# Altium PCB PCB1.PcbDoc
Units mil, origin at the board's own origin, x right, y up, seen from the top; angles counter-clockwise.
Board outline 4291.34 x 2913.39 mil, 2 copper layers (Top Layer, Bottom Layer); 1 components, 2 nets, 7 pads, 0 vias.
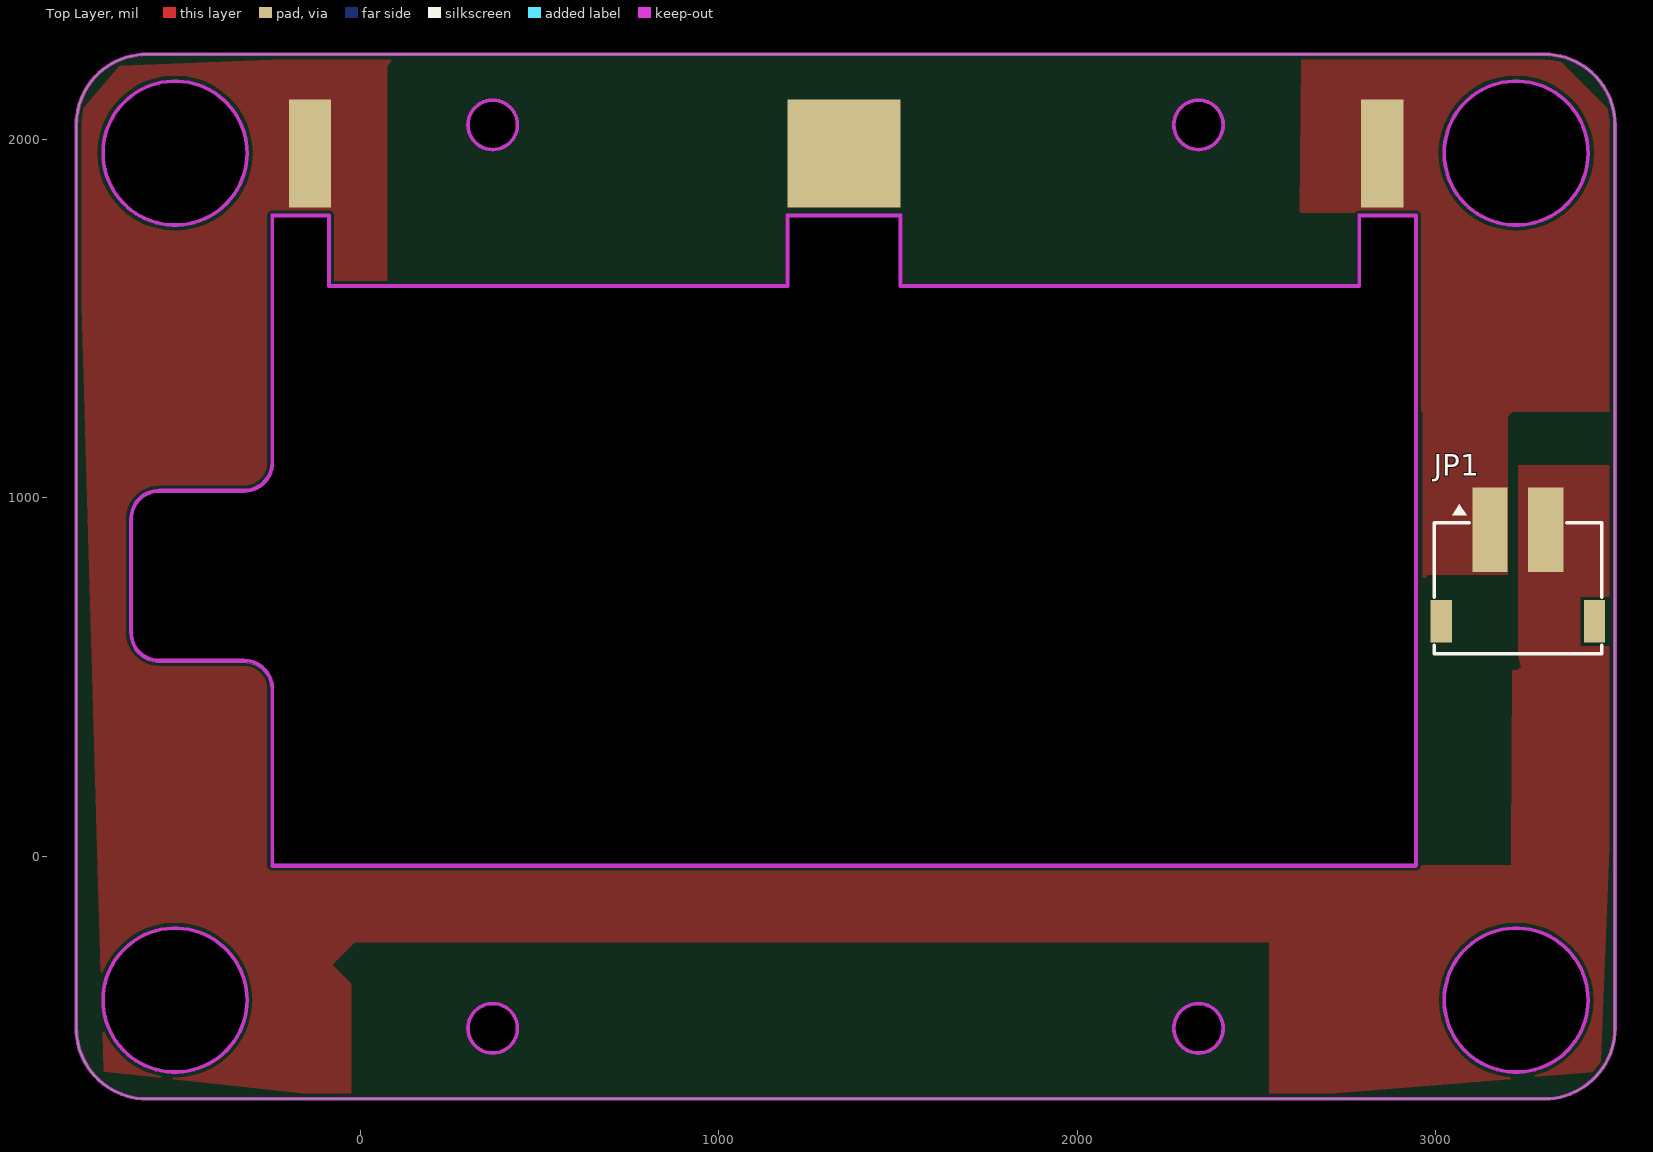
[diagram p0: Top Layer view]
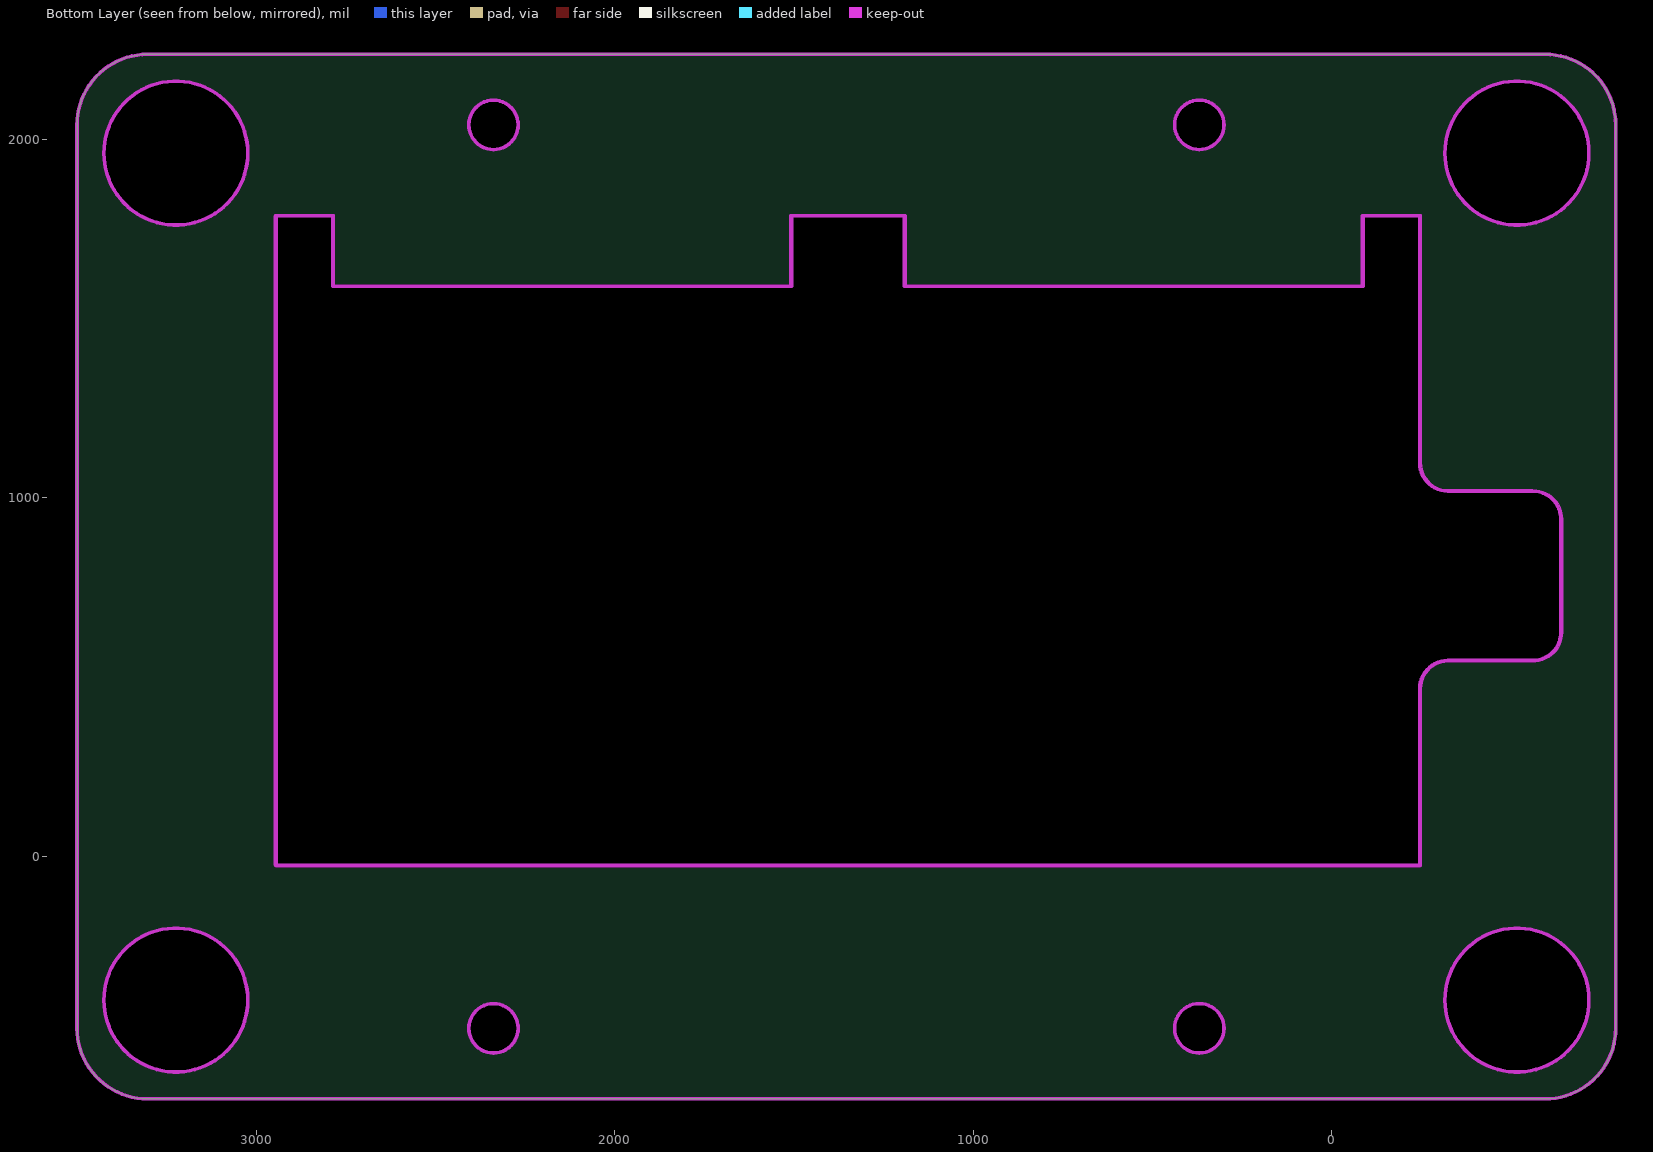
[diagram p1: Bottom Layer view, seen from below]

## Layer stack, top to bottom
Top Solder: solder mask 0.4, Solder Resist, Dk 3.5
Top Layer: signal copper 1.4
Dielectric 1: dielectric 12.6, FR-4, Dk 4.8
Bottom Layer: signal copper 1.4
Bottom Solder: solder mask 0.4, Solder Resist, Dk 3.5

## Board outline
-791.86,-479.85 ccw(c-595.01,-479.85) -595.01,-676.7 3302.63,-676.7 ccw(c3302.63,-479.85) 3499.48,-479.85 3499.48,2039.83 ccw(c3302.63,2039.83) 3302.63,2236.69 -595.01,2236.69 ccw(c-595.01,2039.83) -791.86,2039.83
cut-out: 2269.16,2039.83 ccw(c2338.06,2039.83) 2338.06,1970.94 ccw(c2338.06,2039.83) 2406.96,2039.83 ccw(c2338.06,2039.83) 2338.06,2108.73 ccw(c2338.06,2039.83)
cut-out: 2269.16,-479.85 ccw(c2338.06,-479.85) 2338.06,-548.75 ccw(c2338.06,-479.85) 2406.96,-479.85 ccw(c2338.06,-479.85) 2338.06,-410.95 ccw(c2338.06,-479.85)
cut-out: 300.66,-479.85 ccw(c369.56,-479.85) 369.56,-548.75 ccw(c369.56,-479.85) 438.45,-479.85 ccw(c369.56,-479.85) 369.56,-410.95 ccw(c369.56,-479.85)
cut-out: 369.56,1970.94 cw(c369.56,2039.83) 300.66,2039.83 cw(c369.56,2039.83) 369.56,2108.73 cw(c369.56,2039.83) 438.45,2039.83 cw(c369.56,2039.83)
cut-out: 3023.1,-401.11 ccw(c3223.89,-401.11) 3223.89,-601.9 ccw(c3223.89,-401.11) 3424.67,-401.11 ccw(c3223.89,-401.11) 3223.89,-200.32 ccw(c3223.89,-401.11)
cut-out: 3023.1,1961.09 ccw(c3223.89,1961.09) 3223.89,1760.31 ccw(c3223.89,1961.09) 3424.67,1961.09 ccw(c3223.89,1961.09) 3223.89,2161.88 ccw(c3223.89,1961.09)
cut-out: -516.27,1760.31 cw(c-516.27,1961.09) -717.06,1961.09 cw(c-516.27,1961.09) -516.27,2161.88 cw(c-516.27,1961.09) -315.48,1961.09 cw(c-516.27,1961.09)
cut-out: -717.06,-401.11 ccw(c-516.27,-401.11) -516.27,-601.9 ccw(c-516.27,-401.11) -315.48,-401.11 ccw(c-516.27,-401.11) -516.27,-200.32 ccw(c-516.27,-401.11)
cut-out: -559.96,540.85 -323.74,540.85 cw(c-323.74,467.13) -250.01,467.13 -250.01,-25 ccw(c-245,-25) -245,-30.01 2943.98,-30.01 ccw(c2943.98,-25) 2948.99,-25 2948.99,1786.02 ccw(c2943.98,1786.02) 2943.98,1791.04 2786.5,1791.04 ccw(c2786.5,1786.02) 2781.48,1786.02 2781.48,1594.19 1511.98,1594.19 1511.98,1786.02 ccw(c1506.97,1786.02) 1506.97,1791.04 1192.01,1791.04 ccw(c1192.01,1786.02) 1186.99,1786.02 1186.99,1594.19 -82.5,1594.19 -82.5,1786.02 ccw(c-87.52,1786.02) -87.52,1791.04 -245,1791.04 ccw(c-245,1786.02) -250.01,1786.02 -250.01,1097.05 cw(c-323.74,1097.05) -323.74,1023.32 -559.96,1023.32 ccw(c-559.96,939.57) -643.72,939.57 ccw(c-638.7,939.57) -643.72,939.54 -643.72,624.61 cw(c-638.7,624.61) -643.72,624.64 -643.72,624.61 ccw(c-559.96,624.61)

## Design rules (kind name [scope] priority, off if disabled: settings)
Clearance [All] p1: gap=10 ignorepadtopadclearanceinfootprint=FALSE except(0: Arc-Hole Track-Hole SMDPad-Hole THPad-Hole Via-Hole Fill-Hole Poly-Hole Region-Hole Text-Hole)
PolygonConnect [All] p1: connectstyle=Direct reliefconductorwidth=10 reliefentries=4 polygonreliefangle="90 Angle" airgapwidth=10
RoutingVias [All] p1: holewidth=28 width=50 viastyle="Through Hole" minholewidth=28 minwidth=50 maxholewidth=28 maxwidth=50
SolderMaskExpansion [All] p1: expansion=4
Width [All] p1: maxlimit=100 minlimit=10 preferedwidth=10 minimp=50.000000 maximp=50.000000 favimp=50.000000
30 further rules are at their usual default settings.

## Components (designator, comment, footprint, x,y, rotation, side; value= is the part's Value field where it differs from the comment)
JP1 "HDR-1X2" ZX-VH3.96-2PLT 3228.78,782.95 r0 top locked

## Footprints (in the part's own frame and the unit in brackets; to place one, negate y for a bottom-side part, rotate by r counter-clockwise, add the part's x,y. Pads: shape width x height; smd on the part's side, far side on the other; paste and mask are expansions set on the pad)
ZX-VH3.96-2PLT [mm]
  rect 2.5x6 smd paste+0 mask+0.05: 1(-1.98,3.25) 2(1.98,3.25)
  rect 1.5x3 smd paste+0 mask+0.05: 3(5.43,-3.25) 4(-5.43,-3.25)
  silkscreen extent -5.94,-5.55 5.94,5.04, body extent -5.9,-6.2 5.9,6.1, height 11.9

## Part data
JP1: library part "Header 2", "2P接插件", BOM名称=2P接, 学习资源=www.ooocke.

## Free pads (board coordinates)
  rect 118.11x300 smd paste+0 mask+1.97: 1(-140,1960) 2(2850,1960)
  rect 314.96x300 smd paste+0 mask+1.97: 1(1349.49,1960)

## Nets (pads, with @x,y where several pads share a name; then routed paths per layer and width w, separated by ;. In a path a pad name is that pad's centre, name@x,y a point inside that pad or via, vN(x,y) a via of type N, cw(c..) or ccw(c..) an arc to the next point about the centre after c; other vN are vias at no path point)
GND: JP1.1 pad.2
VCC: JP1.2 pad.1@-140,1960
pads on no net: JP1.3 JP1.4

## Polygon pours and split planes (outlines as drawn)
VCC on Top Layer (solid, pour order 8): 3240,520 3230,530 3230,1090 3494.48,1090 3499.48,1095 3499.48,420 3464.48,385 3230,385 3230,505 3230,560
GND on Top Layer (solid, pour order 6): 3233.89,1259.44 3200,1225.56 3200,784.44 2977.52,784.44 2964.03,770.95 2964.03,1244.44 3205,1244.44
VCC on Top Layer "Top Layer-VCC" (solid, pour order 2): 105,2235 75,2205 75,-25 3210,-25 3210.34,25 3215.68,1069.66 3499.48,1075 3210.34,1075 3205,1069.66 3205,515 3210,520 3499.48,515 3505,520 3457.97,-600.76 2535,-676.7 2535,-240 -15,-240 -77.5,-302.5 -25,-355 -25,-676.7 -715,-600.76 -791.86,2063.55 -670,2205
GND on Top Layer "Top Layer-GND" (solid, pour order 4): 2625,2236.69 2626.69,2235 3328.92,2235 3499.48,2064.44 3499.48,1240 2950,1240 2950,1785.01 2940.01,1795 2620,1795

## Keep-outs
Keep-Out Layer:
  circle w10: c3223.89,1961.09 r200.79
  circle w10: c2338.06,2039.83 r68.9
  circle w10: c369.56,2039.83 r68.9
  circle w10: c-516.27,1961.09 r200.79
  circle w10: c3223.89,-401.11 r200.79
  circle w10: c2338.06,-479.85 r68.9
  circle w10: c369.56,-479.85 r68.9
  circle w10: c-516.27,-401.11 r200.79
  lines w10: -638.7,624.61 ccw(c-559.96,624.61) -559.96,545.87 ; -638.7,624.61 ccw(c-559.96,624.61) -559.96,545.87 ; -638.7,624.61 -638.7,939.57 ; -638.7,624.61 -638.7,939.57 ; -638.7,939.57 cw(c-559.96,939.57) -559.96,1018.31 ; -638.7,939.57 cw(c-559.96,939.57) -559.96,1018.31 ; -559.96,545.87 -323.74,545.87 ; -559.96,545.87 -323.74,545.87 ; -559.96,1018.31 -323.74,1018.31 ; -559.96,1018.31 -323.74,1018.31 ; -323.74,545.87 cw(c-323.74,467.13) -245,467.13 ; -323.74,545.87 cw(c-323.74,467.13) -245,467.13 ; -323.74,1018.31 ccw(c-323.74,1097.05) -245,1097.05 ; -323.74,1018.31 ccw(c-323.74,1097.05) -245,1097.05 ; -245,-25 2943.98,-25 ; -245,-25 -245,467.13 ; -245,-25 -245,467.13 ; -245,-25 2943.98,-25 ; -245,1097.05 -245,1786.02 ; -245,1097.05 -245,1786.02 ; -245,1786.02 -205.63,1786.02 ; -245,1786.02 -205.63,1786.02 ; -205.63,1786.02 -87.52,1786.02 ; -205.63,1786.02 -87.52,1786.02 ; -87.52,1589.17 -87.52,1786.02 ; -87.52,1589.17 -87.52,1786.02 ; -87.52,1589.17 1192.01,1589.17 ; -87.52,1589.17 1192.01,1589.17 ; 1192.01,1589.17 1192.01,1786.02 ; 1192.01,1589.17 1192.01,1786.02 ; 1192.01,1786.02 1506.97,1786.02 ; 1192.01,1786.02 1506.97,1786.02 ; 1506.97,1589.17 2786.5,1589.17 ; 1506.97,1589.17 2786.5,1589.17 ; 1506.97,1589.17 1506.97,1786.02 ; 1506.97,1589.17 1506.97,1786.02 ; 2786.5,1589.17 2786.5,1786.02 ; 2786.5,1589.17 2786.5,1786.02 ; 2786.5,1786.02 2904.61,1786.02 ; 2786.5,1786.02 2904.61,1786.02 ; 2904.61,1786.02 2943.98,1786.02 ; 2904.61,1786.02 2943.98,1786.02 ; 2943.98,-25 2943.98,1786.02 ; 2943.98,-25 2943.98,1786.02 ; -791.86,-479.85 ccw(c-595.01,-479.85) -595.01,-676.7 3302.63,-676.7 ccw(c3302.63,-479.85) 3499.48,-479.85 3499.48,2039.83 ccw(c3302.63,2039.83) 3302.63,2236.69 -595.01,2236.69 ccw(c-595.01,2039.83) -791.86,2039.83 -791.86,-479.85

## Silkscreen, mask and mechanical layers (free items; w line width, h text height)
Mechanical 1:
  circle w10: c2338.06,2039.83 r68.9
  circle w10: c369.56,-479.85 r68.9
  circle w10: c2338.06,-479.85 r68.9
  circle w10: c369.56,2039.83 r68.9
  circle w10: c3223.89,1961.09 r200.79
  circle w10: c3223.89,-401.11 r200.79
  circle w10: c-516.27,-401.11 r200.79
  circle w10: c-516.27,1961.09 r200.79
  lines w10: -638.7,624.61 ccw(c-559.96,624.61) -559.96,545.87 ; -638.7,624.61 ccw(c-559.96,624.61) -559.96,545.87 ; -638.7,624.61 -638.7,939.57 ; -638.7,624.61 -638.7,939.57 ; -638.7,939.57 cw(c-559.96,939.57) -559.96,1018.31 ; -638.7,939.57 cw(c-559.96,939.57) -559.96,1018.31 ; -559.96,545.87 -323.74,545.87 ; -559.96,545.87 -323.74,545.87 ; -559.96,1018.31 -323.74,1018.31 ; -559.96,1018.31 -323.74,1018.31 ; -323.74,545.87 cw(c-323.74,467.13) -245,467.13 ; -323.74,545.87 cw(c-323.74,467.13) -245,467.13 ; -323.74,1018.31 ccw(c-323.74,1097.05) -245,1097.05 ; -323.74,1018.31 ccw(c-323.74,1097.05) -245,1097.05 ; -245,-25 -245,467.13 ; -245,-25 -245,467.13 ; -245,-25 2943.98,-25 ; -245,-25 2943.98,-25 ; -245,1097.05 -245,1786.02 ; -245,1097.05 -245,1786.02 ; -245,1786.02 -205.63,1786.02 ; -245,1786.02 -205.63,1786.02 ; -205.63,1786.02 -87.52,1786.02 ; -205.63,1786.02 -87.52,1786.02 ; -87.52,1589.17 -87.52,1786.02 ; -87.52,1589.17 1192.01,1589.17 ; -87.52,1589.17 1192.01,1589.17 ; -87.52,1589.17 -87.52,1786.02 ; 1192.01,1589.17 1192.01,1786.02 ; 1192.01,1589.17 1192.01,1786.02 ; 1192.01,1786.02 1506.97,1786.02 ; 1192.01,1786.02 1506.97,1786.02 ; 1506.97,1589.17 1506.97,1786.02 ; 1506.97,1589.17 2786.5,1589.17 ; 1506.97,1589.17 2786.5,1589.17 ; 1506.97,1589.17 1506.97,1786.02 ; 2786.5,1589.17 2786.5,1786.02 ; 2786.5,1589.17 2786.5,1786.02 ; 2786.5,1786.02 2904.61,1786.02 ; 2786.5,1786.02 2904.61,1786.02 ; 2904.61,1786.02 2943.98,1786.02 ; 2904.61,1786.02 2943.98,1786.02 ; 2943.98,-25 2943.98,1786.02 ; 2943.98,-25 2943.98,1786.02 ; -791.86,-479.85 ccw(c-595.01,-479.85) -595.01,-676.7 3302.63,-676.7 ccw(c3302.63,-479.85) 3499.48,-479.85 3499.48,2039.83 ccw(c3302.63,2039.83) 3302.63,2236.69 -595.01,2236.69 ccw(c-595.01,2039.83) -791.86,2039.83 -791.86,-479.85